# EAGLE board AVR-usb-isp-connector (EAGLE 5.07)
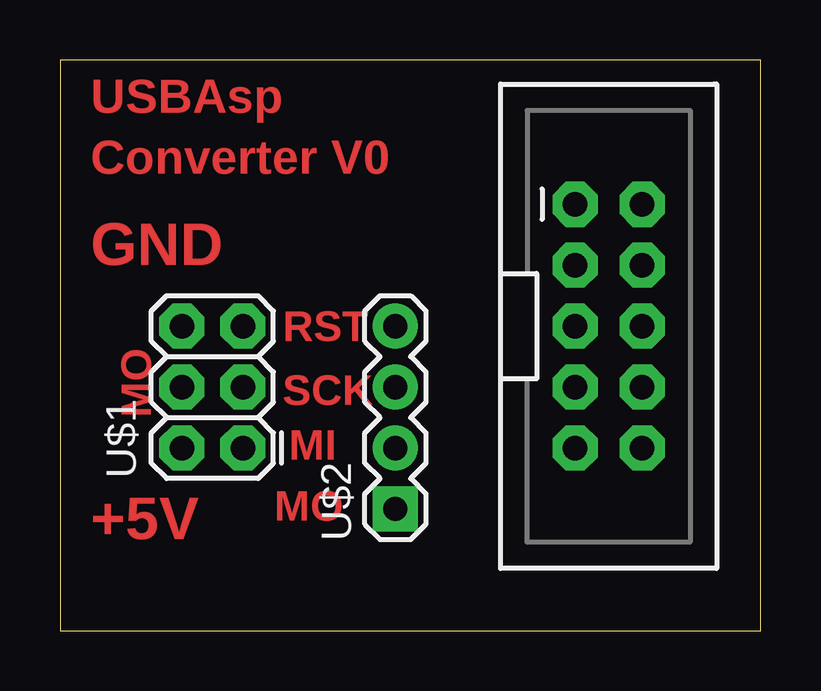
[diagram p0: board, top side]
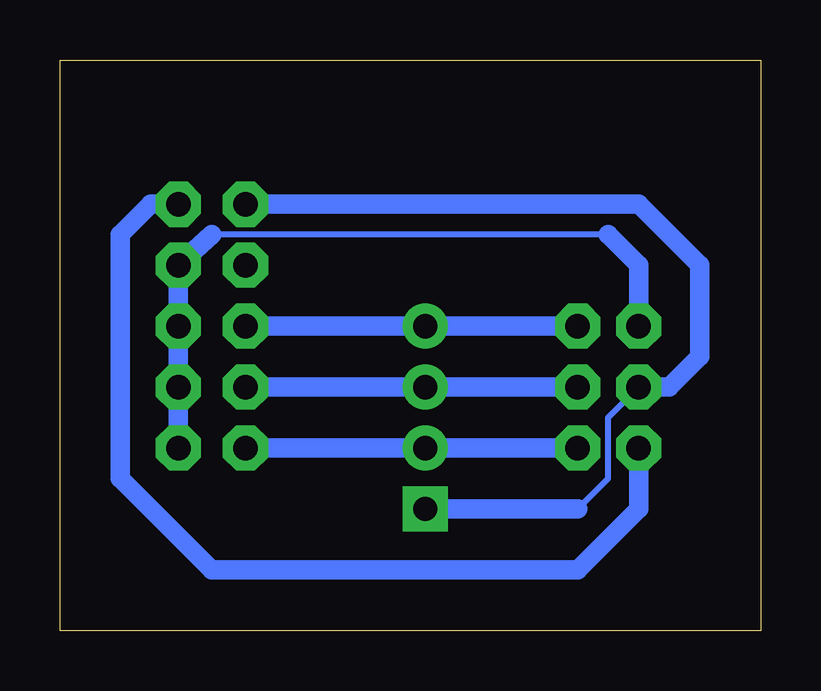
[diagram p1: board, bottom side, seen from below]

Size 29.19 x 23.8 mm. Coordinates in mm from the lower left corner, seen from the top.
Outline: 0,0 29.19,0 29.19,23.8 0,23.8 0,0
Copper layers (1*16): Top 0.035mm / dielectric 1.5mm / Bottom 0.035mm
Design rules "SparkFun-HP1007-600x600dpi": minimum track width 10mil, minimum drill 20mil, track to track 8mil, track to pad 8mil, pad to pad 8mil, via to via 8mil, smd to smd 8mil, copper to edge 12mil, drill to drill 12mil, minimum pad ring 12mil, minimum via ring 10mil, stop-mask expansion 4mil, vias tented up to drill 25mil, thermal gap 10mil

## Footprints (pad centres in the part's own frame; a part is rotated, then mirrored left to right if it is on the bottom)
2X5-SHROUDED_LOCK = drill 1.016 pad 1.88 octagon: 1 -1.397,5.08; 2 1.397,5.08; 3 -1.397,2.54; 4 1.397,2.54; 5 -1.397,0; 6 1.397,0; 7 -1.397,-2.54; 8 1.397,-2.54; 9 -1.397,-5.08; 10 1.397,-5.08
2X3 = drill 1.016 pad 1.88 octagon: 1 0,0; 2 0,2.54; 3 2.54,0; 4 2.54,2.54; 5 5.08,0; 6 5.08,2.54
1X4 = drill 1.016 pad 1.88 square: 5 0,0 | drill 1.016 pad 1.88 round: 6 2.54,0; 7 5.08,0; 8 7.62,0

## Placement (x,y rotation side)
JP1  M05X2SHD_LOCK  [2X5-SHROUDED_LOCK]  22.86,12.7 0 top
U$1  AVR_SPI_PRG_6PTH  [2X3]  7.62,7.62 90 top
U$2  AVR_USBASP_41X4  [1X4]  13.97,5.08 90 top

## Library data of the parts
JP1 = SparkFun
U$1 U$2 = digital-toy

## Nets
GND: JP1.4 JP1.6 JP1.8 JP1.10 U$1.6
MISO: JP1.9 U$1.1 U$2.6
MOSI: JP1.1 U$1.4 U$2.5
NC: JP1.3
RESET: JP1.5 U$1.5 U$2.8
SCK: JP1.7 U$1.3 U$2.7
VTG: JP1.2 U$1.2

## Tracks (layer width: path | path; a pad name or v marks a point on that pad's centre or on a via)
GND
  Bottom 0.254: 6.35,16.51 22.86,16.51
  Bottom 0.813: JP1.10 JP1.8 JP1.6 JP1.4 22.86,16.51 | U$1.6 5.08,15.24 6.35,16.51
MISO
  Bottom 0.813: U$1.1 U$2.6 JP1.9
MOSI
  Bottom 0.254: U$1.4 6.35,8.89 6.35,6.35 7.62,5.08
  Bottom 0.813: JP1.1 5.08,17.78 2.54,15.24 2.54,11.43 3.81,10.16 U$1.4 | 7.62,5.08 U$2.5
RESET
  Bottom 0.813: U$1.5 U$2.8 JP1.5
SCK
  Bottom 0.813: U$1.3 U$2.7 JP1.7
VTG
  Bottom 0.813: JP1.2 25.4,17.78 26.67,16.51 26.67,6.35 22.86,2.54 7.62,2.54 5.08,5.08 U$1.2

## Text on the board
Top: USBAsp | Converter V0 | GND | RST | MO | SCK | MI | MO | +5V